# Altium PCB Dentist_camera_extender_board.PcbDoc
Units mm, origin at the board's own origin, x right, y up, seen from the top; angles counter-clockwise.
Board outline 24 x 16 mm, 2 copper layers (Top Layer, Bottom Layer), stack 1.57 mm thick; 5 components, 29 nets, 62 pads, 8 vias.
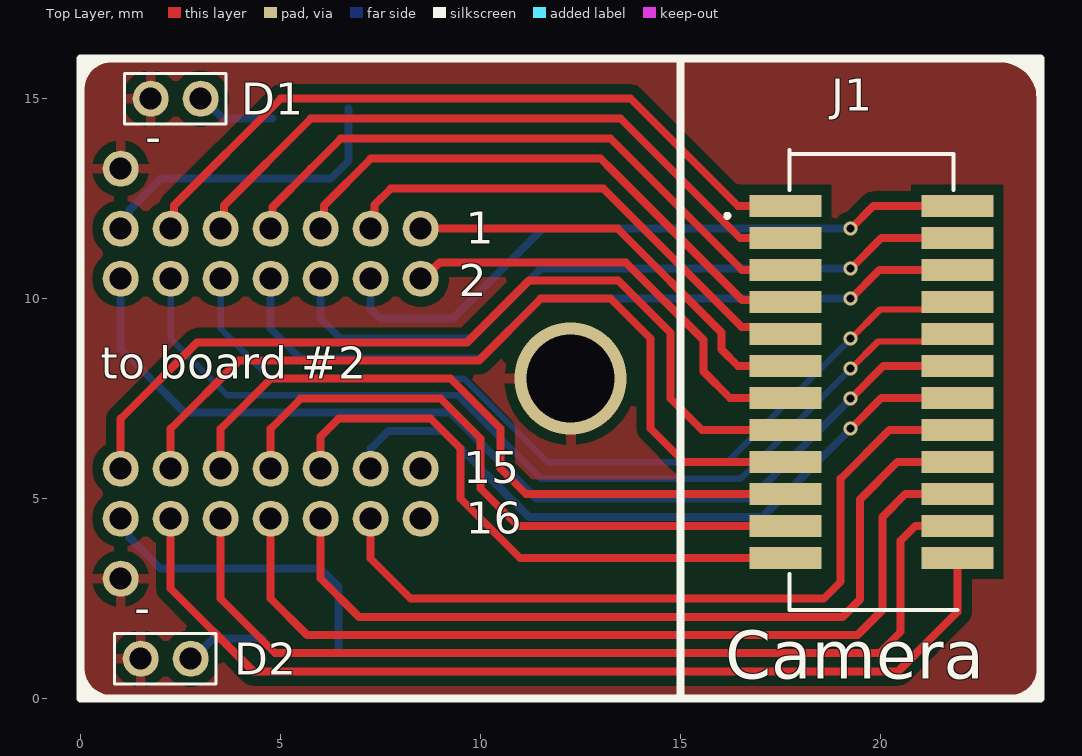
[diagram p0: Top Layer view]
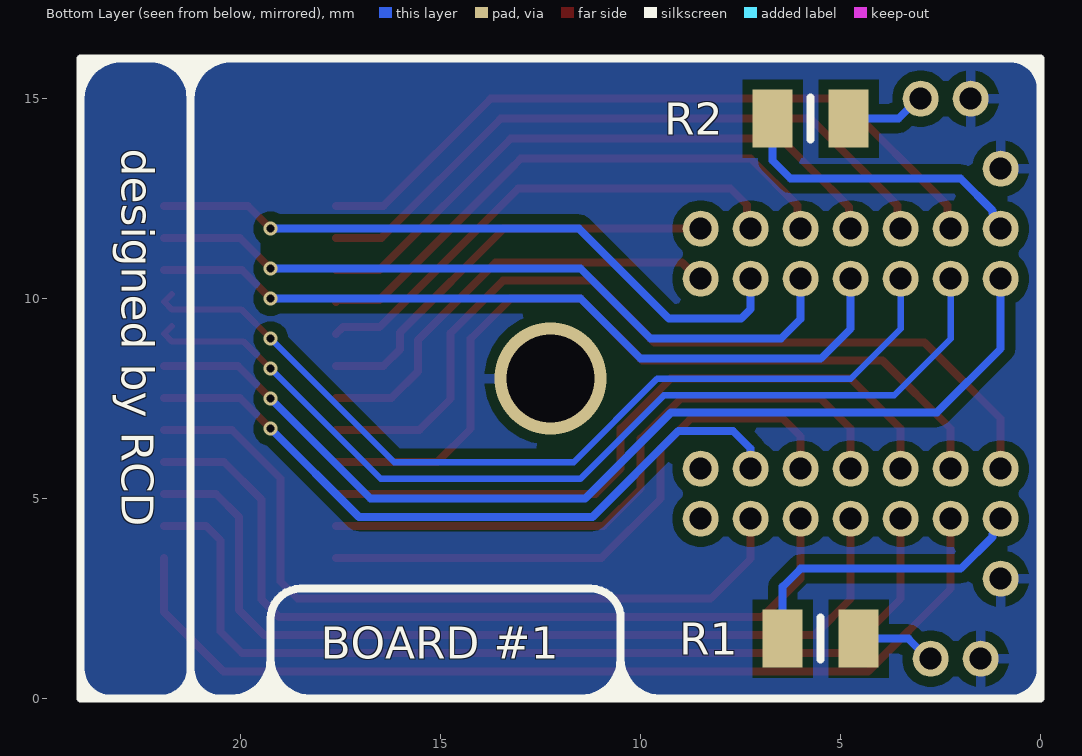
[diagram p1: Bottom Layer view, seen from below]

## Layer stack, top to bottom
Top Solder: solder mask 0.0102, Solder Resist, Dk 3.5
Top Layer: signal copper 0.0356
Dielectric: core 1.4986, Core-043, Dk 4.3
Bottom Layer: signal copper 0.0356
Bottom Solder: solder mask 0.0102, Solder Resist, Dk 3.5

## Board outline
0,0 24,0 24,16 0,16

## Design rules (kind name [scope] priority, off if disabled: settings)
Clearance [All] p1: gap=0.254 ignorepadtopadclearanceinfootprint=FALSE except(0: Arc-Hole Track-Hole SMDPad-Hole THPad-Hole Via-Hole Fill-Hole Poly-Hole Region-Hole Text-Hole; 0.2: SMDPad-SMDPad)
PolygonConnect [All] p1: connectstyle=Relief reliefconductorwidth=0.254 reliefentries=4 polygonreliefangle="90 Angle" airgapwidth=0.254
RoutingVias [All] p1: holewidth=0.2 width=0.35 viastyle="Through Hole" minholewidth=0.2 minwidth=0.35 maxholewidth=0.711 maxwidth=1.27
SolderMaskExpansion [All] p1: expansion=0.102 istentingtop=FALSE
Width [All] p1: maxlimit=2 minlimit=0.16 preferedwidth=0.16 minimp=50.000000 maximp=50.000000 favimp=50.000000
30 further rules are at their usual default settings.

## Classes and differential pairs
component class Dentist_camera_extender_schematic: D1 D2 R1 R2

## Components (designator, comment, footprint, x,y, rotation, side; value= is the part's Value field where it differs from the comment)
D1 "LED1" 2_PIN_CONNECTOR 3,15 r180 top
D2 "LED1" 2_PIN_CONNECTOR 2.75,1 r180 top
J1 "53309-2470" 533092470 19.664,7.972 r90 top locked
R1 "300R, 0805" RESC2012X65N 5.5,1.5 r180 bottom
R2 "300R, 0805" RESC2012X65N 5.75,14.5 r180 bottom

## Footprints (in the part's own frame and the unit in brackets; to place one, negate y for a bottom-side part, rotate by r counter-clockwise, add the part's x,y. Pads: shape width x height; smd on the part's side, far side on the other; paste and mask are expansions set on the pad)
2_PIN_CONNECTOR [mm]
  round 0.9 hole 0.55: 1(0,0) 2(1.25,0)
  silkscreen extent -0.64,-0.64 1.91,0.64
533092470 [mm]
  rect 0.55x1.8 smd: 1(4.35,2.05) 2(4.35,-2.25) 3(3.55,2.05) 4(3.55,-2.25) 5(2.75,2.05) 6(2.75,-2.25) 7(1.95,2.05) 8(1.95,-2.25) 9(1.15,2.05) 10(1.15,-2.25) 11(0.35,2.05) 12(0.35,-2.25) 13(-0.45,2.05) 14(-0.45,-2.25) 15(-1.25,2.05) 16(-1.25,-2.25) 17(-2.05,2.05) 18(-2.05,-2.25) 19(-2.85,2.05) 20(-2.85,-2.25) 21(-3.65,2.05) 22(-3.65,-2.25) 23(-4.45,2.05) 24(-4.45,-2.25)
  silkscreen extent -5.75,-2.25 5.75,3.55, body extent -5.73,-2.62 5.67,2.48, height 4.69
RESC2012X65N [mm]
  rect 1x1.45 smd: 1(-0.95,0) 2(0.95,0)
  silkscreen extent 0,-0.53 0,0.53, body extent -1,-0.63 1,0.63, height 0.65

## Part data
D1 D2: "Typical RED GaAs LED", LatestRevisionDate=08-Jul-2005, LatestRevisionNote="Mech Layer 1 removed.", PackageDescription="LED; 2 Leads", PackageReference=LED-1, Published=8-Jun-2000, Publisher="Altium Limited"
J1: "Connector", Manufacturer_Name=Molex, Manufacturer_Part_Number=53307-2471, Mouser Part Number=538-53307-2471, Datasheet Link=https://www.mouser.com/datasheet/2/276/0533072471_PCB_HEADERS-146544.pdf, Height=3.85mm, Mouser Price/Stock=https://www.mouser.co.uk/ProductDetail/Molex/53307-2471?qs=3DzawVMofg%252Bx9c%2FNm7UacA%3D%3D
R1 R2: library part CPF0805B100RE1, "Resistor", Manufacturer_Name="TE Connectivity", Mouser Part Number=279-CPF0805B100RE1, Arrow Part Number=CPF0805B100RE1, Arrow Price/Stock=https://www.arrow.com/en/products/cpf0805b100re1/te-connectivity, Datasheet Link=http://docs-europe.electrocomponents.com/webdocs/13d1/0900766b813d116f.pdf, Height=0.65mm, Manufacturer_Part_Number=CPF0805B100RE1, Mouser Price/Stock=https://www.mouser.co.uk/ProductDetail/TE-Connectivity-Neohm/CPF0805B100RE1/?qs=9ylKvqdyudkCWLPT1QvLZQ%3D%3D

## Free pads (board coordinates)
  round 0.9 hole 0.55: 1(8.5,11.75) 2(8.5,10.5) 3(7.25,11.75) 4(7.25,10.5) 5(6,11.75) 6(6,10.5) 7(4.75,11.75) 8(4.75,10.5) 9(3.5,11.75) 10(3.5,10.5) 11(2.25,11.75) 12(2.25,10.5) 13(1,11.75) 14(1,10.5) 15(8.5,5.75) 16(8.5,4.5) 17(7.25,5.75) 18(7.25,4.5) 19(6,5.75) 20(6,4.5) 21(4.75,5.75) 22(4.75,4.5) 23(3.5,5.75) 24(3.5,4.5) 25(2.25,5.75) 26(2.25,4.5) 27(1,5.75) 28(1,4.5) 29(1,13.25) 30(1,3)

## Via types
v1: diameter 0.35, hole 0.2, Top Layer to Bottom Layer, 7 vias
v2: diameter 2.8, hole 2.2, Top Layer to Bottom Layer, 1 vias

## Nets (pads, with @x,y where several pads share a name; then routed paths per layer and width w, separated by ;. In a path a pad name is that pad's centre, name@x,y a point inside that pad or via, vN(x,y) a via of type N, cw(c..) or ccw(c..) an arc to the next point about the centre after c; other vN are vias at no path point)
GND: D1.2 D2.2 pad.29 pad.30
  other v2: 12.25,8
NetD1_1: D1.1 R2.2 | length 2
  Bottom Layer w0.2: D1.1 3.061,15 3.561,14.5 R2.2
NetD2_1: D2.1 R1.2 | length 2
  Bottom Layer w0.2: D2.1 2.811,1 3.311,1.5 R1.2
NetJ1_1: J1.1 pad.11 | length 18.1
  Top Layer w0.2: pad.11 2.33,11.83 2.33,12.33 5,15 13.75,15 16.428,12.322 J1.1
NetJ1_2: J1.2 pad.4 | length 16.7
  Top Layer w0.2: v1(19.25,11.75) 19.822,12.322 J1.2
  Bottom Layer w0.2: pad.4 7.25,9.742 7.492,9.5 9.296,9.5 11.546,11.75 v1(19.25,11.75)
NetJ1_3: J1.3 pad.9 | length 16.8
  Top Layer w0.2: pad.9 3.58,11.83 3.58,12.33 5.75,14.5 13.5,14.5 16.478,11.522 J1.3
NetJ1_4: J1.4 pad.6 | length 18.2
  Top Layer w0.2: v1(19.25,10.75) 20.022,11.522 J1.4
  Bottom Layer w0.2: pad.6 6,9.499 6.499,9 9.75,9 11.5,10.75 v1(19.25,10.75)
NetJ1_5: J1.5 pad.7 | length 15.4
  Top Layer w0.2: pad.7 4.792,11.792 4.792,12.292 5.75,13.25 6.5,14 13.25,14 16.528,10.722 J1.5
NetJ1_6: J1.6 pad.8 | length 19.6
  Top Layer w0.2: v1(19.25,10) 19.972,10.722 J1.6
  Bottom Layer w0.2: pad.8 4.75,9.25 5.5,8.5 10,8.5 11.5,10 v1(19.25,10)
NetJ1_7: J1.7 pad.5 | length 14.1
  Top Layer w0.2: pad.5 6.08,11.83 6.08,12.33 7.25,13.5 13,13.5 13.296,13.204 16.531,9.969 17.568,9.969 J1.7
NetJ1_8: J1.8 pad.10 | length 23
  Top Layer w0.16: v1(19.25,9) 19.981,9.731 21.723,9.731 J1.8 J1.8@21.723,10.113
  Bottom Layer w0.16: pad.10 3.5,9.25 4.75,8 9.591,8 11.677,5.914 16.164,5.914 v1(19.25,9)
NetJ1_9: J1.9 pad.3 | length 12.6
  Top Layer w0.2: pad.3 7.348,11.848 7.348,12.348 7.75,12.75 13.068,12.75 16.525,9.293 17.443,9.293 J1.9
NetJ1_10: J1.10 pad.12 | length 24.4
  Top Layer w0.16: v1(19.25,8.25) 19.931,8.931 21.723,8.931 J1.10 J1.10@21.723,9.313
  Bottom Layer w0.16: pad.12 2.25,9 3.664,7.586 9.42,7.586 11.506,5.5 16.5,5.5 v1(19.25,8.25)
NetJ1_11: J1.11 pad.1 | length 10.8
  Top Layer w0.2: pad.1 13.426,11.75 16.02,9.156 16.02,8.73 16.428,8.322 J1.11
NetJ1_12: J1.12 pad.14 | length 25.6
  Top Layer w0.2: v1(19.25,7.5) 20.072,8.322 J1.12
  Bottom Layer w0.2: pad.14 1,8.75 2.598,7.152 9.24,7.152 11.392,5 16.75,5 v1(19.25,7.5)
NetJ1_13: J1.13 pad.2 | length 11.1
  Top Layer w0.2: pad.2 8.559,10.5 8.967,10.908 13.626,10.908 15.566,8.968 15.566,8.184 16.228,7.522 J1.13
NetJ1_14: J1.14 pad.17 | length 17.5
  Top Layer w0.2: v1(19.25,6.75) 20.022,7.522 J1.14
  Bottom Layer w0.2: pad.17 7.25,6.25 7.698,6.698 9.052,6.698 11.204,4.546 17.046,4.546 v1(19.25,6.75)
NetJ1_15: J1.15 pad.27 | length 21.8
  Top Layer w0.2: pad.27 1,7 2.908,8.908 9.658,8.908 11.204,10.454 13.438,10.454 14.75,9.142 14.75,7.5 15.528,6.722 J1.15
NetJ1_16: J1.16 pad.18 | length 19.3
  Top Layer w0.2: pad.18 7.25,3.5 8.25,2.5 18.575,2.5 19,2.925 19,5.5 20.222,6.722 J1.16
NetJ1_17: J1.17 pad.25 | length 20.7
  Top Layer w0.2: pad.25 2.25,6.75 3.954,8.454 9.954,8.454 11.5,10 13.25,10 14.25,9 14.25,6.75 15.078,5.922 J1.17
NetJ1_18: J1.18 pad.20 | length 20.9
  Top Layer w0.2: pad.20 6,3 6.954,2.046 19.046,2.046 19.482,2.482 19.482,4.982 20.422,5.922 J1.18
NetJ1_19: J1.19 pad.23 | length 17.4
  Top Layer w0.2: pad.23 3.5,6.75 4.75,8 9.25,8 10.5,6.75 10.5,5.75 11.128,5.122 J1.19
NetJ1_20: J1.20 pad.22 | length 22.4
  Top Layer w0.2: pad.22 4.75,2.5 5.658,1.592 19.417,1.592 20.046,2.221 20.046,4.546 20.622,5.122 J1.20
NetJ1_21: J1.21 pad.21 | length 16.2
  Top Layer w0.2: pad.21 4.75,6.75 5.5,7.5 9,7.5 10,6.5 10,5.25 10.928,4.322 J1.21
NetJ1_22: J1.22 pad.24 | length 23.6
  Top Layer w0.2: pad.24 3.5,2.5 4.862,1.138 19.963,1.138 20.5,1.675 20.5,3.955 20.867,4.322 J1.22
NetJ1_23: J1.23 pad.19 | length 14.8
  Top Layer w0.2: pad.19 6,6.554 6.446,7 8.75,7 9.5,6.25 9.5,5 10.978,3.522 J1.23
NetJ1_24: J1.24 pad.26 | length 24.2
  Top Layer w0.2: pad.26 2.25,2.75 4.316,0.684 20.434,0.684 21.914,2.164 J1.24
NetP1_25: pad.28 R1.1 | length 7.9
  Bottom Layer w0.2: pad.28 1,4.311 1.205,4.105 1.205,4.045 2,3.25 6,3.25 6.45,2.8 R1.1 R1.1@6.45,1.25
NetP1_26: pad.13 R2.1 | length 7.9
  Bottom Layer w0.2: pad.13 1,11.939 1.205,12.145 1.205,12.205 2,13 6.25,13 6.7,13.45 R2.1 R2.1@6.7,14.75

## Polygon pours and split planes (outlines as drawn)
GND on Top Layer "GND_L01_P000" (solid, remove dead copper, pour order 0): 0,0 24,0 24,16 0,16
GND on Bottom Layer "GND_L01_P001" (solid, remove dead copper, pour order 1): 0,0 24,0 24,16 0,16

## Other copper
Bottom Layer:
  pour cut-out: 19.493,11.114 19.493,11.386 19.007,11.386 19.004,11.389 19.004,11.111 19.49,11.111

## Silkscreen, mask and mechanical layers (free items; w line width, h text height)
Top Overlay:
  lines w0.2: 0,0.5 ccw(c0.5,0.5) 0.5,0 ; 0,0.75 ccw(c0.75,0.75) 0.75,0 ; 0,15.25 cw(c0.75,15.25) 0.75,16 ; 0,15.5 cw(c0.5,15.5) 0.5,16 ; 15,16 15,1 15,0 24,0 ; 23,16 cw(c23,15) 24,15 ; 23.25,0 ccw(c23.25,0.75) 24,0.75 ; 23.5,0 ccw(c23.5,0.5) 24,0.5 ; 24,0 0,0 0,16 24,16 24,0 ; 23.5,16 ccw(c23.75,16) 23.75,15.75 cw(c23.75,15.5) 24,15.5 ccw(c23.5,15.5) 23.5,16
  text "-" at 2.015,14.264 h0.8 r180
  text "1" at 9.627,11.377 h0.8
  text "2" at 9.456,10.056 h0.8
  text "to board #2" at 0.504,8.004 h0.8
  text "15" at 9.557,5.384 h0.8
  text "16" at 9.627,4.127 h0.8
  text "-" at 1.741,2.487 h0.8 r180
  text "Camera" at 16.119,0.503 h1.2
Bottom Overlay:
  lines w0.2: 0,0.5 ccw(c0.5,0.5) 0.5,0 ; 0,0.75 ccw(c0.75,0.75) 0.75,0 ; 0,15.25 cw(c0.75,15.25) 0.75,16 ; 0,15.5 cw(c0.5,15.5) 0.5,16 ; 10.5,0.5 cw(c10,0.5) 10,0 9.75,0 ccw(c9.75,0.75) 10.5,0.75 ; 10.75,0.25 10.5,0.25 ; 11.5,0 cw(c11.5,1) 10.5,1 ; 18.25,0 ccw(c18.25,1) 19.25,1 ; 18.5,0 18.625,0 ccw(c18.625,0.625) 19.25,0.625 19.25,0.5 ; 19,0 ccw(c19,0.25) 19.25,0.25 ; 19.75,0 cw(c19.75,0.5) 19.25,0.5 ; 20,0 cw(c20,0.75) 19.25,0.75 19.25,0.5 ; 20.25,16 cw(c20.25,15) 21.25,15 ; 20.5,0 ccw(c20.5,0.75) 21.25,0.75 ; 21,15.875 20.75,15.875 21.75,15.875 ; 21.125,0 21.25,0 ; 21.125,0.125 21.25,0.125 21.5,0.125 ; 21.188,15.5 21.188,15.75 ; 21.25,0.25 21.25,0 ; 21.25,0.5 21.25,0 ; 21.25,15.5 21.25,15.75 ; 21.25,15.625 21.375,15.625 21.375,15.75 ; 21.375,16 21.375,15.75 ; 21.75,16 21,16 21,15.75 ; 22,0 cw(c22,0.75) 21.25,0.75 ; 22.25,16 ccw(c22.25,15) 21.25,15 ; 23,16 cw(c23,15) 24,15 ; 23.25,0 ccw(c23.25,0.75) 24,0.75 ; 23.5,0 ccw(c23.5,0.5) 24,0.5 ; 23.5,16 cw(c23.5,15.5) 24,15.5 ; 23.875,15.75 23.75,15.75 23.75,16 24,16 ; 24,2.25 24,13 ; 10.5,0.25 ccw(c10.75,0.25) 10.75,0 cw(c10.75,0.059) 10.691,0.059 10.691,0.25 10.5,0.25 ; 10.5,0.25 10.5,0.75 ; 10.5,0.75 ccw(c11.25,0.75) 11.25,0 ; 10.5,0.75 10.5,0.75 ; 10.5,1 cw(c9.5,1) 9.5,0 20.25,0 cw(c20.25,1) 19.25,1 ; 10.5,1 10.5,2 cw(c11.25,2) 11.25,2.75 18.5,2.75 cw(c18.5,2) 19.25,2 19.25,1 ; 11.25,0 11.25,0 ; 21,0 21.25,0 ; 21,0 21.25,0 ; 21,0 21.25,0 ; 21,15.75 21.375,15.75 ; 21,15.75 21.5,15.75 ; 21,15.75 21.5,15.75 ; 21,15.75 21.25,15.75 ; 21.25,0.75 21.25,15 ; 21.25,15.75 21.25,16 21.5,16 ; 21.25,15.75 21.125,15.75 21.125,16 21.5,16 ; 21.5,15.75 21.5,16 ; 24,16 24,0 0,0 0,16 24,16
  text "designed by RCD" at 22.979,13.746 h0.8 r90
  text "BOARD #1" at 17.996,1.004 h0.8